# EAGLE board 4081_5 (EAGLE 5.06)
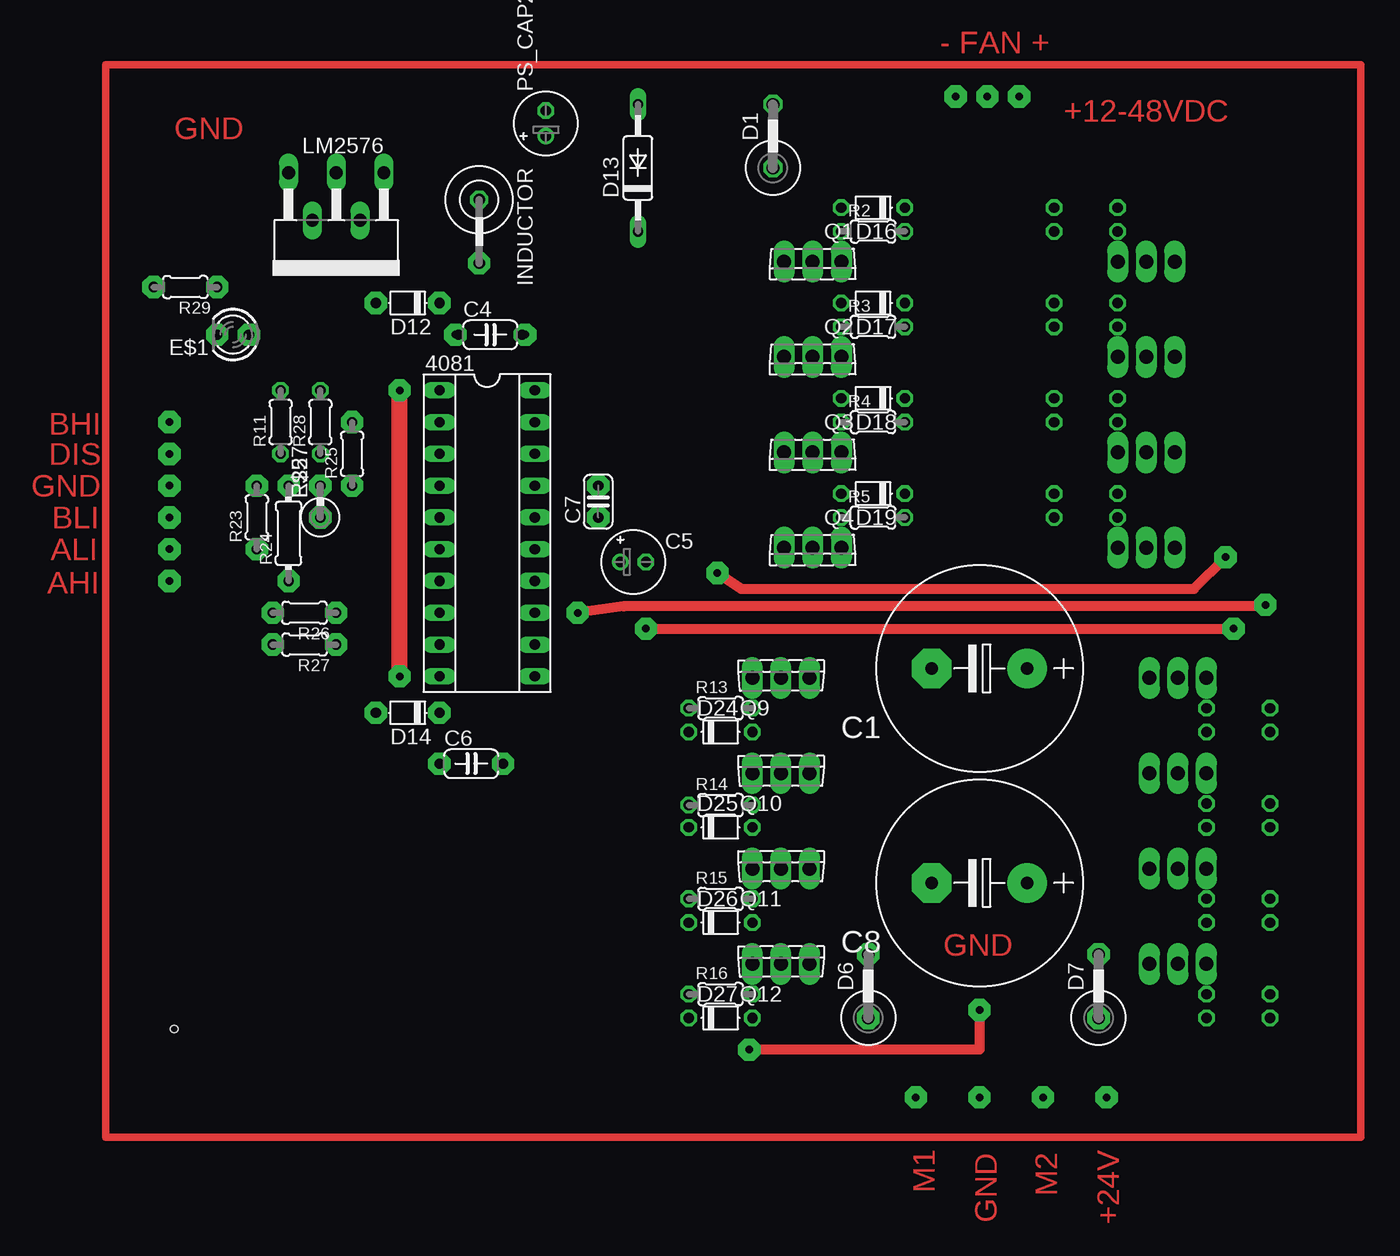
[diagram p0: board, top side]
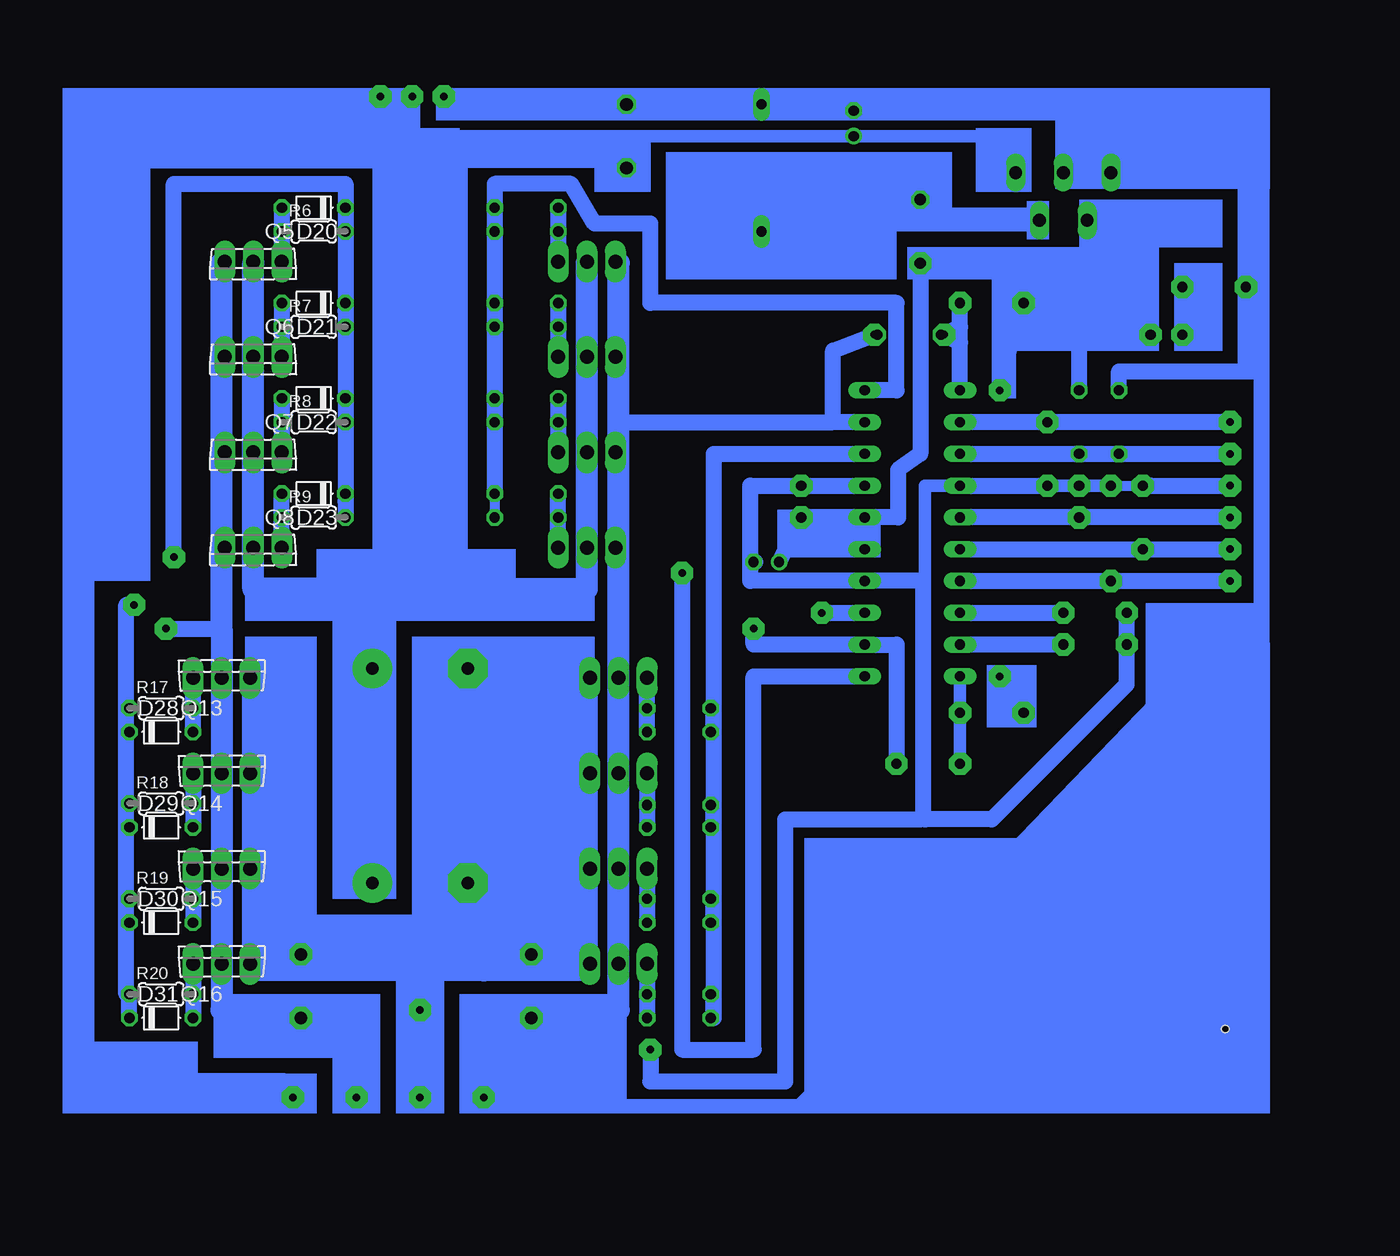
[diagram p1: board, bottom side, seen from below]

No outline drawn. Coordinates in mm, seen from the top.
Copper layers (1*16): Top 0.035mm / dielectric 1.5mm / Bottom 0.035mm
Design rules "default": minimum track width 10mil, minimum drill 24mil, track to track 8mil, track to pad 8mil, pad to pad 8mil, via to via 8mil, smd to smd 8mil, copper to edge 40mil, drill to drill 8mil, minimum pad ring 10mil, minimum via ring 8mil, stop-mask expansion 4mil, vias tented up to drill 0mil, thermal gap 10mil
Holes 0.6 mm at 5.71,-0.51

## Footprints (pad centres in the part's own frame; a part is rotated, then mirrored left to right if it is on the bottom)
SOCKET-20 = drill 0.813 long: 1 -11.43,-3.81; 2 -8.89,-3.81; 3 -6.35,-3.81; 4 -3.81,-3.81; 5 -1.27,-3.81; 6 1.27,-3.81; 7 3.81,-3.81; 8 6.35,-3.81; 9 8.89,-3.81; 10 11.43,-3.81; 11 11.43,3.81; 12 8.89,3.81; 13 6.35,3.81; 14 3.81,3.81; 15 1.27,3.81; 16 -1.27,3.81; 17 -3.81,3.81; 18 -6.35,3.81; 19 -8.89,3.81; 20 -11.43,3.81
E7,5-16 = drill 1.016 pad 3.15 round: + -3.81,0 | drill 1.016 pad 3.15 octagon: - 3.81,0
C050-024X044 = drill 0.813 octagon: 1 -2.54,0; 2 2.54,0
E2-5 = drill 0.813 pad 1.27 round: + -1.016,0 | drill 0.813 pad 1.27 octagon: - 1.016,0
C025-024X044 = drill 0.813 octagon: 1 -1.27,0; 2 1.27,0
0414V = drill 1.016 octagon: 1 -2.54,0; 2 2.54,0
D-5 = drill 0.813 octagon: A 2.54,0; C -2.54,0
C2992 = drill 0.813 long: A 5.08,0; C -5.08,0
LED3MM = drill 0.813 octagon: A -1.27,0; K 1.27,0
0309V = drill 0.813 octagon: 1 -1.27,0; 2 1.27,0
LBC-SE = drill 0.914 octagon: 1 -2.54,0; 2 2.54,0
CB360 = drill 1.016 long: 1 -3.81,-8.255; 2 -1.905,-4.445; 3 0,-8.255; 4 1.905,-4.445; 5 3.81,-8.255
C369-1 = drill 1.118 long: D 0,-1.397; G -2.286,-1.397; S 2.286,-1.397
0204/5 = drill 0.813 octagon: 1 -2.54,0; 2 2.54,0
0204/7 = drill 0.813 octagon: 1 -3.81,0; 2 3.81,0

## Placement (x,y rotation side)
4081  [SOCKET-20]  30.73,39.12 270 top
C1  [E7,5-16]  70.1,28.32 180 top
C4  [C050-024X044]  30.99,54.99 0 top
C5  330uF  [E2-5]  42.42,36.83 0 top
C6  [C050-024X044]  29.46,20.7 0 top
C7  .47uf  [C025-024X044]  39.62,41.66 90 top
C8  [E7,5-16]  70.1,11.18 180 top
D1  1.5k  [0414V]  53.59,70.87 90 top
D6  1.5k  [0414V]  61.21,2.92 90 top
D7  1.5k  [0414V]  79.63,2.92 90 top
D12  [D-5]  24.38,57.53 180 top
D13  [C2992]  42.8,68.33 90 top
D14  [D-5]  24.38,24.77 180 top
D16  [D-5]  61.59,65.15 180 top
D17  [D-5]  61.59,57.53 180 top
D18  [D-5]  61.59,49.91 180 top
D19  [D-5]  61.59,42.29 180 top
D20  [D-5]  78.61,65.15 180 bottom
D21  [D-5]  78.61,57.53 180 bottom
D22  [D-5]  78.61,49.91 180 bottom
D23  [D-5]  78.61,42.29 180 bottom
D24  [D-5]  49.4,23.24 0 top
D25  [D-5]  49.4,15.62 0 top
D26  [D-5]  49.4,8 0 top
D27  [D-5]  49.4,0.38 0 top
D28  [D-5]  90.81,23.24 0 bottom
D29  [D-5]  90.81,15.62 0 bottom
D30  [D-5]  90.81,8 0 bottom
D31  [D-5]  90.81,0.38 0 bottom
E$1  [LED3MM]  10.41,54.99 180 top
E$57  [0309V]  17.4,41.66 90 top
INDUCTOR  330uH  [LBC-SE]  30.1,63.25 270 top
LM2576  [CB360]  18.67,59.69 180 top
PS_CAP2  100uF  [E2-5]  35.43,71.88 90 top
Q1  [C369-1]  56.77,59.44 180 top
Q2  [C369-1]  56.77,51.82 180 top
Q3  [C369-1]  56.77,44.2 180 top
Q4  [C369-1]  56.77,36.58 180 top
Q5  [C369-1]  83.44,59.44 180 bottom
Q6  [C369-1]  83.44,51.82 180 bottom
Q7  [C369-1]  83.44,44.2 180 bottom
Q8  [C369-1]  83.44,36.58 180 bottom
Q9  [C369-1]  54.23,28.96 0 top
Q10  [C369-1]  54.23,21.34 0 top
Q11  [C369-1]  54.23,13.72 0 top
Q12  [C369-1]  54.23,6.1 0 top
Q13  [C369-1]  85.98,28.96 0 bottom
Q14  [C369-1]  85.98,21.34 0 bottom
Q15  [C369-1]  85.98,13.72 0 bottom
Q16  [C369-1]  85.98,6.1 0 bottom
R2  [0204/5]  61.59,63.25 0 top
R3  [0204/5]  61.59,55.63 0 top
R4  [0204/5]  61.59,48.01 0 top
R5  [0204/5]  61.59,40.39 0 top
R6  [0204/5]  78.61,63.25 0 bottom
R7  [0204/5]  78.61,55.63 0 bottom
R8  [0204/5]  78.61,48.01 0 bottom
R9  [0204/5]  78.61,40.39 0 bottom
R11  [0204/5]  14.22,48.01 90 top
R13  [0204/5]  49.4,25.15 0 top
R14  [0204/5]  49.4,17.4 0 top
R15  [0204/5]  49.4,9.91 0 top
R16  [0204/5]  49.4,2.29 0 top
R17  [0204/5]  90.81,25.15 0 bottom
R18  [0204/5]  90.81,17.53 0 bottom
R19  [0204/5]  90.81,9.91 0 bottom
R20  [0204/5]  90.81,2.29 0 bottom
R22  [0309V]  17.4,41.66 90 top
R23  [0204/5]  12.32,40.39 90 top
R24  [0204/7]  14.86,39.12 90 top
R25  [0204/5]  19.94,45.47 90 top
R26  [0204/5]  16.13,32.77 180 top
R27  [0204/5]  16.13,30.23 180 top
R28  [0204/5]  17.4,48.01 90 top
R29  [0204/5]  6.6,58.8 180 top

## Library data of the parts
4081 = ic-package
C1 C4-C8 D1 D6 D7 E$57 PS_CAP2 R2-R9 R11 R13-R20 R22-R29 = rcl
D12-D14 D16-D31 = diode
E$1 = led
INDUCTOR = inductors
LM2576 = linear
Q1-Q16 = ref-packages

## Nets
GND2: 4081.4
R24: 4081.5
S$2: 4081.19
S$5: 4081.13 D28.C D29.C D30.C D31.C
S$6: D24.A
S$7: D25.A
S$8: D26.A
S$9: D27.A
S$10: 4081.18 D24.C D25.C D26.C D27.C
S$11: 4081.15 4081.16 C5.+
S$12: D19.A
S$13: D16.A
S$14: D17.A
S$15: D18.A
S$16: 4081.20 D16.C D17.C D18.C D19.C R2.2 R3.2 R4.2 R5.2
S$17: 4081.11 D20.C D21.C D22.C D23.C R6.2 R7.2 R8.2 R9.2
S$19: 4081.12
S$20: D28.A
S$21: D29.A
S$22: D30.A
S$23: D31.A
S$25: D23.A
S$27: D20.A
S$28: D21.A
S$29: D22.A
S$30: 4081.14 4081.17 C1.-
S$33: 4081.10
S$34: 4081.1
S$36: C8.+
S$37: INDUCTOR.1
S$38: C5.-
S$41: R11.2
S$43: R28.2
S$76: 4081.2
S$78: 4081.3
S$80: 4081.9
S$81: 4081.8
S$83: 4081.6
S$84: 4081.7

## Tracks (layer width: path | path; a pad name or v marks a point on that pad's centre or on a via)
GND2  (via drill 0.6 pad 1.78)
  Bottom 0.813: v14.86,42.93 v12.32,42.93
  Bottom 1.016: v14.86,42.93 v17.4,42.93 v19.94,42.93 | 4081.4 29.72,42.93 29.72,16.26
  Bottom 1.27: 4081.4 v19.94,42.93 | v13.59,32.77 v13.59,30.23 13.59,27.05 24.38,16.26 29.72,16.26
R24  (via drill 0.6 pad 1.78)
  Bottom 1.27: 4081.5 v17.4,40.39 v5.33,40.39
S$1
  Top 0.61: 0.25,-9.14 100.58,-9.14 100.58,76.58 0.25,76.58 0.25,-9.14
S$2  (via drill 0.6 pad 1.78)
  Bottom 1.27: 54.23,48.01 37.08,48.01 | 4081.19 37.08,48.01 | 37.08,48.01 37.08,53.72 v33.78,54.99
  Bottom 1.778: v65.02,-5.97 65.02,1.02 54.23,1.02 54.23,48.01 54.23,60.71
S$4
  Bottom 1.778: 56.77,4.83 56.77,27.69
S$5  (via drill 0.6 pad 1.78)
  Top 0.813: v92.96,33.4 92.96,33.27 41.66,33.27 v37.97,32.77
  Bottom 0.813: 93.34,2.29 93.6,2.29 | D28.C 93.34,25.15 93.6,25.15 | D29.C 93.34,17.53 93.6,17.53 | D30.C 93.34,9.91 93.6,9.91 | 93.6,33.4 v92.96,33.4
  Bottom 1.27: D31.C 93.34,2.29 | 93.6,2.29 93.6,9.91 93.6,17.53 93.6,25.15 93.6,33.4 | v37.97,32.77 4081.13
S$6
  Bottom 1.27: D24.A 51.94,27.69
S$7
  Bottom 1.27: 51.94,20.07 D25.A
S$8
  Bottom 1.27: 51.94,12.45 D26.A
S$9
  Bottom 1.27: 51.94,4.83 D27.A
S$10
  Bottom 0.813: D27.C 46.86,2.29 46.61,0.38 | D24.C 46.86,25.15 46.61,25.15 | D25.C 46.86,17.53 46.61,17.53 | D26.C 46.86,9.91 46.61,8
  Bottom 1.27: 46.61,0.38 46.61,8 46.61,17.53 46.61,25.15 46.61,45.47 4081.18
S$11  (via drill 0.6 pad 1.78)
  Top 1.27: v23.75,27.69 v23.75,50.55
  Bottom 1.016: 4081.16 4081.15 | 16.13,63.88 16.13,60.71 23.75,60.71 | 23.75,60.71 30.1,60.71 | v21.84,57.53 23.75,60.71 | v21.84,57.53 23.75,60.07 | v23.75,50.55 v21.84,57.53
  Bottom 1.27: C5.+ 40.89,37.85 4081.15 4081.16 | 4081.16 v39.62,40.39 | 4081.16 31.88,40.39 31.88,44.2 30.1,45.47 30.1,60.71 | v23.75,27.69 21.84,27.69 v21.84,24.77 21.84,24.64
S$12
  Bottom 1.27: 59.05,37.85 D19.A
S$13
  Bottom 1.27: D16.A 59.05,60.71
S$14
  Bottom 1.27: D17.A 59.05,53.09
S$15
  Bottom 1.27: D18.A 59.05,45.59
S$16
  Bottom 0.813: D16.C R2.2 | R3.2 64.14,57.02 D17.C | D18.C R4.2 | D19.C R5.2
  Bottom 1.27: D19.C D18.C 64.14,57.02 D16.C 64.14,67.06 58.04,67.06 56.13,63.88 51.69,63.88 51.69,57.53 32,57.53 32,50.55 4081.20
S$17  (via drill 0.6 pad 1.78)
  Top 0.813: v89.79,37.21 87.25,34.67 51.05,34.67 v49.15,35.94
  Bottom 0.813: D22.C R8.2 | 76.07,41.66 D23.C | R7.2 76.07,56.9 D21.C | D20.C R6.2
  Bottom 1.27: R9.2 76.07,41.66 D22.C 76.07,56.9 D20.C 76.07,67.06 89.79,67.06 v89.79,37.21 | v49.15,35.94 49.15,-2.16 43.43,-2.16 43.43,27.69 4081.11
S$18  (via drill 0.6 pad 1.78)
  other vias: 61.21,0.38
S$19  (via drill 0.6 pad 1.78)
  Top 0.813: v43.43,31.5 v90.42,31.5
  Bottom 1.27: v90.42,31.5 85.98,31.5 | v43.43,31.5 43.43,30.23 4081.12 32,30.23 v32,20.7
  Bottom 1.778: 85.98,60.71 85.98,31.5 85.98,1.02 75.18,1.02
  Bottom 2.54: v75.18,-5.97 75.18,1.02
S$20
  Bottom 1.27: D28.A 88.27,27.69
S$21
  Bottom 1.27: 88.27,19.94 D29.A
S$22
  Bottom 1.27: 88.27,12.45 D30.A
S$23
  Bottom 1.27: 88.27,4.7 D31.A
S$24
  Bottom 1.016: 31.37,63.88 42.8,63.88
S$25
  Bottom 1.27: 81.15,37.85 D23.A
S$26  (via drill 0.6 pad 1.78)
  other vias: 61.21,5.46
S$27
  Bottom 1.27: D20.A 81.15,60.71
S$28
  Bottom 1.27: D21.A 81.15,53.21
S$29
  Bottom 1.27: D22.A 81.15,45.47
S$30  (via drill 0.6 pad 1.78)
  Top 0.813: v70.1,1.02 70.1,-2.16 v51.69,-2.16
  Bottom 0.813: 30.1,16.26 30.1,35.31
  Bottom 1.27: v51.69,-2.16 51.69,-4.7 40.89,-4.7 40.89,16.26 30.1,16.26 | 30.1,35.31 4081.14 43.69,35.31 43.69,42.93 v39.62,42.93 4081.17
  Bottom 1.778: 56.77,4.19 65.02,4.19 | 65.02,4.19 70.1,4.19 | 70.1,4.19 83.44,4.19 83.44,27.69 | C1.- 65.02,4.19 | v70.1,-5.97 v70.1,1.02 70.1,4.19
S$31  (via drill 0.6 pad 1.78)
  other vias: 79.63,0.38
S$32  (via drill 0.6 pad 1.78)
  other vias: 79.63,5.46
S$33  (via drill 0.6 pad 1.78)
  Bottom 1.016: v26.92,20.7 v26.92,24.77 4081.10
S$34  (via drill 0.6 pad 1.78)
  Bottom 1.27: 4081.1 26.92,55.63 v28.19,54.99 26.92,54.36 v26.92,57.53
S$35
  Bottom 1.016: 39.62,-6.6 56.13,-6.6
  Bottom 1.27: 39.62,-6.6 8.26,24.77 2.79,30.23 2.79,67.06
  Bottom 6.452: 21.72,9.91 8.13,24 8.26,24.77 22.99,9.53
S$36
  Bottom 0.406: 70.1,69.6 69.47,69.6
  Bottom 0.813: 70.1,34.67 70.1,69.6
  Bottom 1.778: 56.77,60.71 56.77,34.67 70.1,34.67 75.18,34.67 | 83.44,60.71 83.44,34.67 75.18,34.67 | C8.+ 75.18,34.67
S$37
  Bottom 1.016: INDUCTOR.1 30.1,64.52 21.21,64.52
S$38
  Bottom 1.27: C5.- 43.31,36.83
S$39  (via drill 0.6 pad 1.78)
  other vias: 30.1,60.71
S$40  (via drill 0.6 pad 1.78)
  Bottom 1.016: 70.74,69.6 v70.74,74.04 v73.28,74.04 73.28,69.6
  Bottom 2.54: 70.74,69.6 73.28,69.6 97.41,69.6 97.41,-5.33 80.9,-5.33 v80.26,-5.97
S$41
  Bottom 1.27: R11.2 14.22,52.07 2.92,52.07
S$42
  Bottom 1.016: 67.56,69.6 67.56,70.87 23.75,70.87 23.75,67.06
S$43
  Bottom 1.27: 17.4,50.8 R28.2 17.4,53.98
S$44  (via drill 0.6 pad 1.78)
  Bottom 1.27: 11.68,42.93 v5.33,42.93
S$45  (via drill 0.6 pad 1.78)
  Bottom 1.016: v68.2,74.04 18.67,74.04 18.67,67.06
S$46  (via drill 0.6 pad 1.78)
  other vias: 11.68,54.99
S$47  (via drill 0.6 pad 1.78)
  other vias: 9.14,54.99
S$48  (via drill 0.6 pad 1.78)
  other vias: 9.14,58.8
S$49  (via drill 0.6 pad 1.78)
  other vias: 4.06,58.8
S$76  (via drill 0.6 pad 1.78)
  Bottom 1.27: 4081.2 v19.94,48.01 v5.33,48.01
S$78  (via drill 0.6 pad 1.78)
  Bottom 1.27: 4081.3 v5.33,45.47
S$80  (via drill 0.6 pad 1.78)
  Bottom 1.27: v18.67,30.23 4081.9
S$81  (via drill 0.6 pad 1.78)
  Bottom 1.27: 4081.8 v18.67,32.77
S$83  (via drill 0.6 pad 1.78)
  Bottom 1.27: 4081.6 v12.32,37.85 v5.33,37.85
S$84  (via drill 0.6 pad 1.78)
  Bottom 1.27: 4081.7 v14.86,35.31 v5.33,35.31
(copper drawn outside any net)
  shapes: Bottom area x114

## Text on the board
Top: - FAN + | +12-48VDC | GND | BHI | DIS | GND | BLI | ALI | AHI | GND | GND | M1 | M2 | +24V